# Altium PCB Pulp FMC Sensor Board_8X64Mbits_HyperRam.PcbDoc (part 2 of 3)
Units mm, origin at the board's own origin, x right, y up, seen from the top; angles counter-clockwise.
Board outline 72.9 x 68.96 mm, 4 copper layers (Top Layer, GND, PWR, Bottom Layer), stack 1.56 mm thick; 43 components, 37 nets, 422 pads, 283 vias.
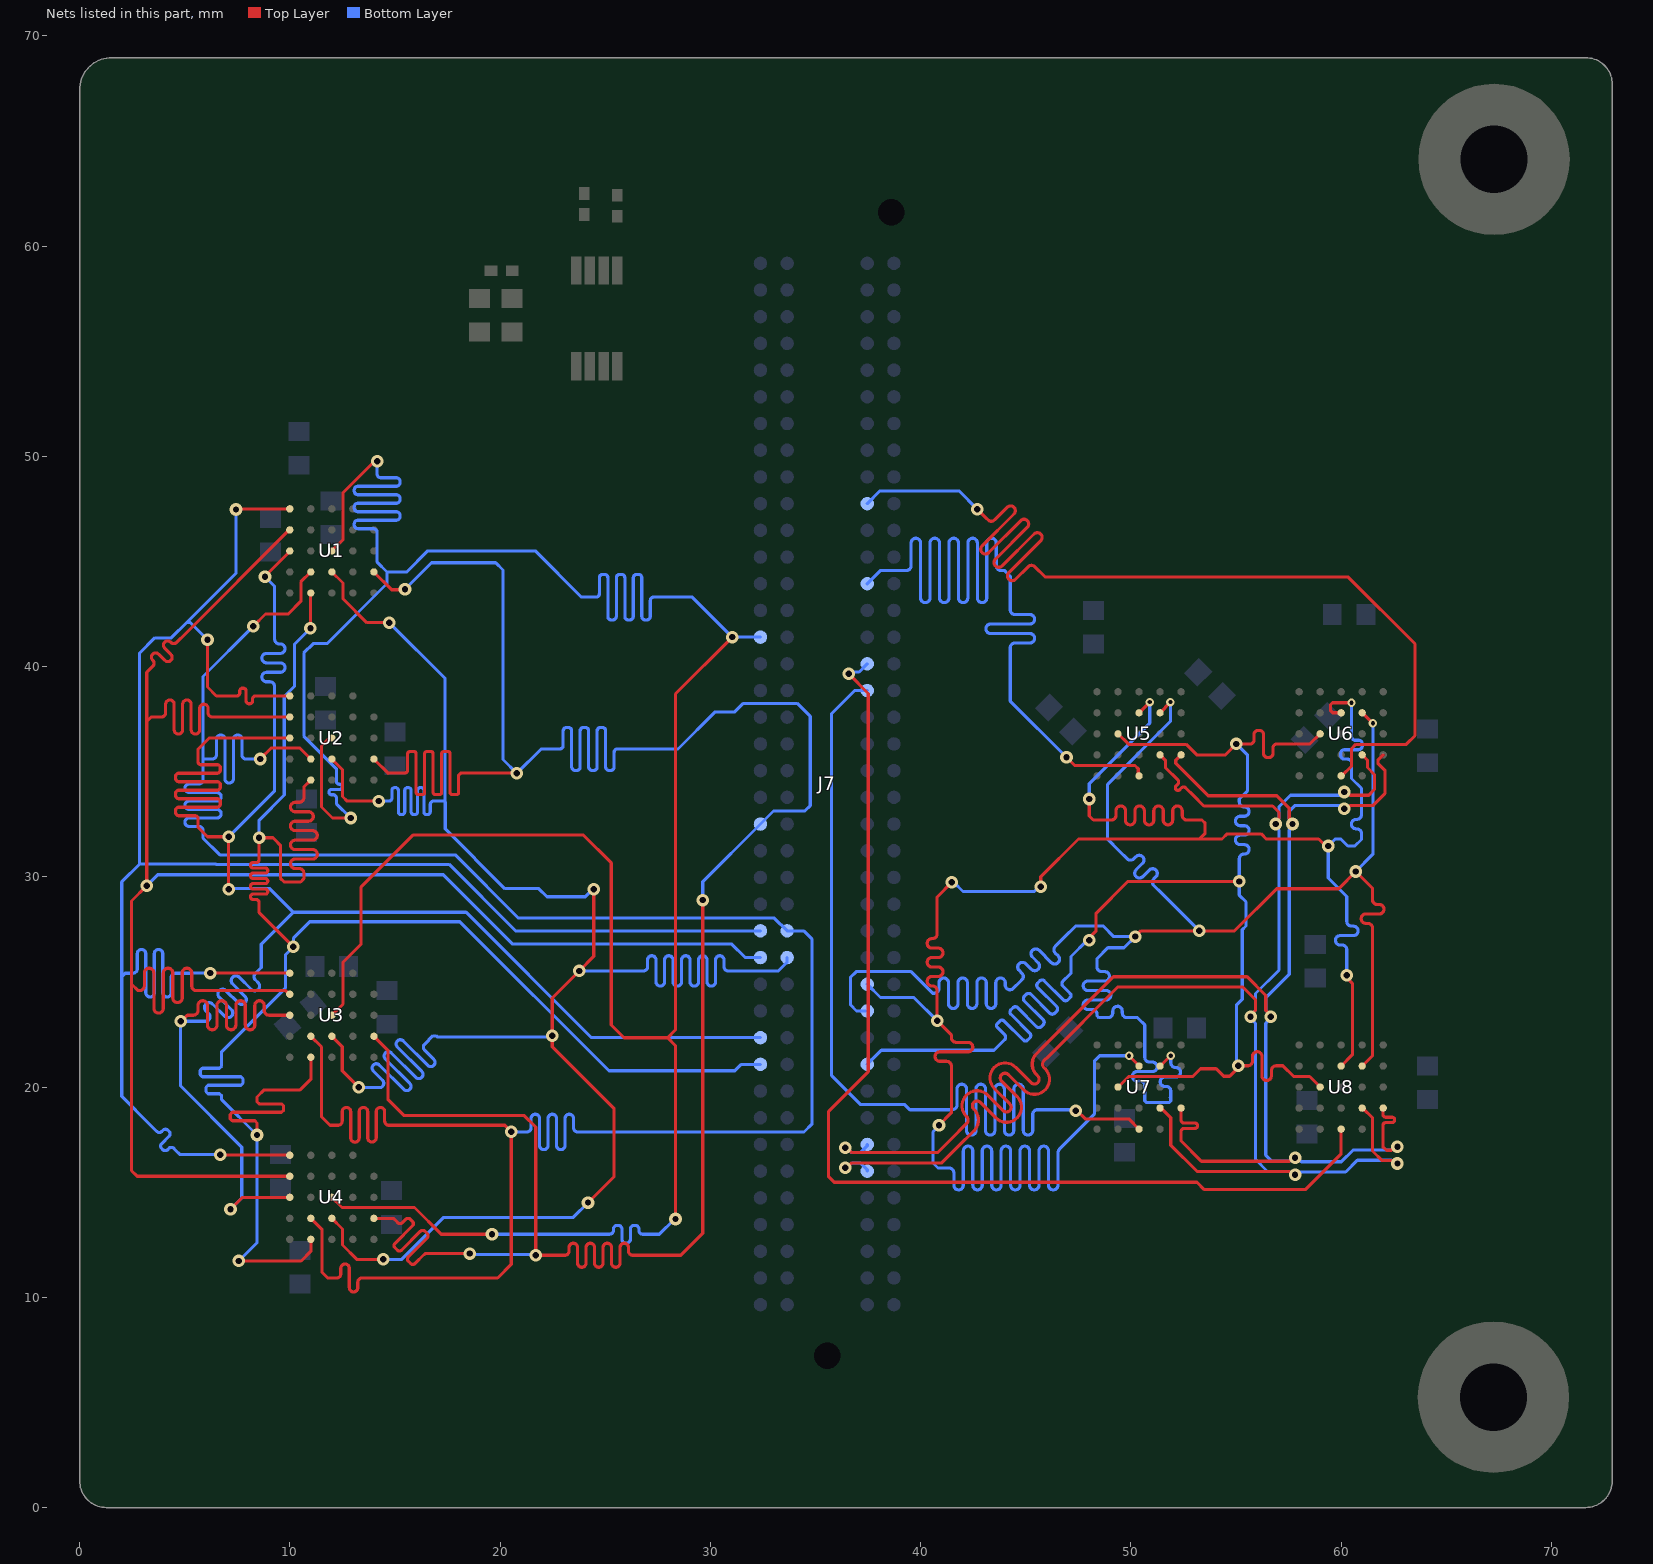
[diagram p4: the nets of this part, all layers, seen from the top]

## Via types
v1: diameter 0.6, hole 0.3, Top Layer to Bottom Layer, tented both sides, 210 vias
v2: diameter 0.4, hole 0.2, Top Layer to Bottom Layer, tented both sides, 73 vias

## Nets (pads, with @x,y where several pads share a name; then routed paths per layer and width w, separated by ;. In a path a pad name is that pad's centre, name@x,y a point inside that pad or via, vN(x,y) a via of type N, cw(c..) or ccw(c..) an arc to the next point about the centre after c; other vN are vias at no path point) (continued)
FMC_HYPER2_D2: J7.D14 U1.C4 U2.C4 U3.C4 U4.C4 | length 115.2
  Top Layer w0.15: U4.C4@11.995,13.755 12.5,13.25 12.5,12.485 13.18,11.805 v1(14.444,11.805) ; U3.C4@11.995,22.417 12.49,21.922 12.49,20.773 v1(13.276,19.987) ; U2.C4@11.995,35.602 12.5,35.097 12.5,33.821 12.719,33.602 v1(14.222,33.602) ; U1.C4@11.995,44.5 12.522,43.972 12.522,43.226 13.661,42.088 v1(14.722,42.088) ; v1(24.18,14.505) 25.419,15.744 25.419,18.969 22.475,21.913 v1(22.475,22.435) 22.475,24.235 v1(23.763,25.523) 24.454,26.214 v1(24.454,29.409)
  Bottom Layer w0.15: v1(13.276,19.987) 14.352,19.987 14.405,20.04 ccw(c14.262,20.183) 14.405,20.326 13.968,20.763 cw(c14.111,20.906) 13.968,21.049 cw(c14.111,20.906) 14.254,21.049 15.413,19.889 ccw(c15.556,20.032) 15.699,19.889 ccw(c15.556,20.032) 15.699,20.175 14.539,21.334 cw(c14.682,21.477) 14.539,21.62 cw(c14.682,21.477) 14.825,21.62 15.985,20.46 ccw(c16.128,20.603) 16.27,20.46 ccw(c16.128,20.603) 16.27,20.746 15.111,21.906 cw(c15.254,22.048) 15.111,22.191 cw(c15.254,22.048) 15.396,22.191 16.556,21.032 ccw(c16.699,21.174) 16.842,21.032 ccw(c16.699,21.174) 16.842,21.317 16.405,21.754 cw(c16.548,21.897) 16.405,22.04 16.8,22.435 16.956,22.435 17.006,22.385 18.435,22.385 18.437,22.387 22.427,22.387 v1(22.475,22.435) ; v1(14.222,33.602) 14.627,33.602 14.702,33.602 ccw(c14.702,33.752) 14.852,33.752 14.852,34.107 cw(c14.989,34.107) 14.989,34.244 15.02,34.244 cw(c15.02,34.107) 15.156,34.107 15.156,33.096 ccw(c15.293,33.096) 15.293,32.96 15.324,32.96 ccw(c15.324,33.096) 15.46,33.096 15.46,34.107 cw(c15.597,34.107) 15.597,34.244 15.628,34.244 cw(c15.628,34.107) 15.764,34.107 15.764,33.096 ccw(c15.901,33.096) 15.901,32.96 15.932,32.96 ccw(c15.932,33.096) 16.068,33.096 16.068,34.107 cw(c16.205,34.107) 16.205,34.244 16.236,34.244 cw(c16.236,34.107) 16.372,34.107 16.372,33.096 ccw(c16.509,33.096) 16.509,32.96 16.54,32.96 ccw(c16.54,33.096) 16.676,33.096 16.676,33.452 cw(c16.826,33.452) 16.826,33.602 17.115,33.602 17.343,33.602 ; v1(14.444,11.805) 15.317,11.805 17.314,13.801 23.477,13.801 v1(24.18,14.505) ; v1(14.722,42.088) 17.379,39.431 17.379,33.566 ; 17.389,33.556 17.389,32.278 20.226,29.44 21.84,29.44 22.228,29.053 24.044,29.053 24.4,29.409 v1(24.454,29.409) ; v1(23.763,25.523) 26.735,25.523 26.81,25.523 ccw(c26.81,25.725) 27.012,25.725 27.012,26.043 cw(c27.214,26.043) 27.214,26.245 cw(c27.214,26.043) 27.416,26.043 27.416,25.003 ccw(c27.618,25.003) 27.618,24.801 ccw(c27.618,25.003) 27.82,25.003 27.82,26.043 cw(c28.022,26.043) 28.022,26.245 cw(c28.022,26.043) 28.224,26.043 28.224,25.003 ccw(c28.426,25.003) 28.426,24.801 ccw(c28.426,25.003) 28.628,25.003 28.628,26.043 cw(c28.83,26.043) 28.83,26.245 cw(c28.83,26.043) 29.032,26.043 29.032,25.003 ccw(c29.234,25.003) 29.234,24.801 ccw(c29.234,25.003) 29.436,25.003 29.436,26.043 cw(c29.638,26.043) 29.638,26.245 cw(c29.638,26.043) 29.84,26.043 29.84,25.003 ccw(c30.042,25.003) 30.042,24.801 ccw(c30.042,25.003) 30.244,25.003 30.244,26.043 cw(c30.446,26.043) 30.446,26.245 cw(c30.446,26.043) 30.648,26.043 30.648,25.725 ccw(c30.85,25.725) 30.85,25.523 31.241,25.523 33.223,25.523 33.65,25.95 J7.D14@33.65,26.16
FMC_HYPER2_D3: J7.D15 U1.D4 U2.D4 U3.D4 U4.D4 | length 137.5
  Top Layer w0.15: v1(8.252,41.911) 8.84,42.5 9.922,42.5 10.521,43.099 10.521,44.026 U1.D4@10.995,44.5 ; v1(8.594,35.602) 8.594,35.612 9.11,36.128 10.468,36.128 U2.D4@10.995,35.602 ; U4.D4@10.995,13.755 11.532,13.218 11.532,11.182 11.793,10.92 12.144,10.92 12.219,10.92 ccw(c12.219,11.122) 12.421,11.122 12.421,11.38 cw(c12.623,11.38) 12.623,11.582 cw(c12.623,11.38) 12.825,11.38 12.825,10.46 ccw(c13.027,10.46) 13.027,10.258 ccw(c13.027,10.46) 13.229,10.46 13.229,10.718 cw(c13.431,10.718) 13.431,10.92 14.085,10.92 19.878,10.92 20.53,11.572 v1(20.53,17.867) 20.215,18.182 15.111,18.182 14.709,18.182 cw(c14.709,18.384) 14.507,18.384 14.507,18.832 ccw(c14.305,18.832) 14.305,19.034 ccw(c14.305,18.832) 14.103,18.832 14.103,17.589 cw(c13.901,17.589) 13.901,17.387 cw(c13.901,17.589) 13.699,17.589 13.699,18.832 ccw(c13.497,18.832) 13.497,19.034 ccw(c13.497,18.832) 13.295,18.832 13.295,17.58 cw(c13.093,17.58) 13.093,17.378 cw(c13.093,17.58) 12.891,17.58 12.891,18.832 ccw(c12.689,18.832) 12.689,19.034 ccw(c12.689,18.832) 12.487,18.832 12.487,18.384 cw(c12.285,18.384) 12.285,18.182 12.21,18.182 11.905,18.182 11.501,18.586 11.501,21.91 U3.D4@10.995,22.417
  Bottom Layer w0.15: v1(8.252,41.911) 5.867,39.527 5.867,35.602 ; v1(8.594,35.602) 8.566,35.602 7.918,35.602 cw(c7.918,35.804) 7.716,35.804 7.716,36.542 ccw(c7.514,36.542) 7.514,36.744 ccw(c7.514,36.542) 7.312,36.542 7.312,34.662 cw(c7.11,34.662) 7.11,34.46 cw(c7.11,34.662) 6.908,34.662 6.908,36.542 ccw(c6.706,36.542) 6.706,36.744 ccw(c6.706,36.542) 6.504,36.542 6.504,35.804 cw(c6.302,35.804) 6.302,35.602 6.227,35.602 5.867,35.602 ; v1(20.53,17.867) 20.532,17.865 21.193,17.865 21.268,17.865 ccw(c21.268,18.067) 21.47,18.067 21.47,18.505 cw(c21.672,18.505) 21.672,18.707 cw(c21.672,18.505) 21.874,18.505 21.874,17.225 ccw(c22.076,17.225) 22.076,17.023 ccw(c22.076,17.225) 22.278,17.225 22.278,18.505 cw(c22.48,18.505) 22.48,18.707 cw(c22.48,18.505) 22.682,18.505 22.682,17.225 ccw(c22.884,17.225) 22.884,17.023 ccw(c22.884,17.225) 23.086,17.225 23.086,18.505 cw(c23.288,18.505) 23.288,18.707 cw(c23.288,18.505) 23.49,18.505 23.49,18.067 ccw(c23.692,18.067) 23.692,17.865 24.14,17.865 34.451,17.865 34.837,18.251 34.837,27.026 34.433,27.43 J7.D15@33.65,27.43 33.042,28.038 20.874,28.038 17.87,31.042 6.667,31.042 5.867,31.842 5.867,32.118 5.867,32.193 ccw(c5.665,32.193) 5.665,32.395 5.207,32.395 cw(c5.207,32.597) 5.005,32.597 cw(c5.207,32.597) 5.207,32.799 6.527,32.799 ccw(c6.527,33.001) 6.729,33.001 ccw(c6.527,33.001) 6.527,33.203 5.207,33.203 cw(c5.207,33.405) 5.005,33.405 cw(c5.207,33.405) 5.207,33.607 6.527,33.607 ccw(c6.527,33.809) 6.729,33.809 ccw(c6.527,33.809) 6.527,34.011 5.207,34.011 cw(c5.207,34.213) 5.005,34.213 cw(c5.207,34.213) 5.207,34.415 5.665,34.415 ccw(c5.665,34.617) 5.867,34.617 5.867,34.928 5.867,35.602
FMC_HYPER2_D4: J7.C10 U1.D5 U2.D5 U3.D5 U4.D5 | length 102.4
  Top Layer w0.15: v1(7.569,11.73) 10.535,11.73 10.995,12.19 U4.D5@10.995,12.755 ; 8.122,30.55 ccw(c8.247,30.55) 8.247,30.425 8.821,30.425 cw(c8.821,30.3) 8.946,30.3 cw(c8.821,30.3) 8.821,30.175 8.247,30.175 ccw(c8.247,30.05) 8.122,30.05 ccw(c8.247,30.05) 8.247,29.925 8.821,29.925 cw(c8.821,29.8) 8.946,29.8 cw(c8.821,29.8) 8.821,29.675 8.247,29.675 ccw(c8.247,29.55) 8.122,29.55 ccw(c8.247,29.55) 8.247,29.425 8.821,29.425 cw(c8.821,29.3) 8.946,29.3 cw(c8.821,29.3) 8.821,29.175 8.247,29.175 ccw(c8.247,29.05) 8.122,29.05 ccw(c8.247,29.05) 8.247,28.925 8.384,28.925 cw(c8.384,28.775) 8.534,28.775 8.534,28.7 8.534,28.295 v1(10.16,26.669) ; 8.122,30.55 cw(c8.247,30.55) 8.247,30.675 8.384,30.675 ccw(c8.384,30.825) 8.534,30.825 8.534,31.189 v1(8.534,31.86) 9.188,31.86 9.273,31.775 9.546,31.502 9.546,29.935 9.727,29.755 10.506,29.755 10.665,29.913 10.665,30.095 10.665,30.17 ccw(c10.44,30.17) 10.44,30.395 10.251,30.395 cw(c10.251,30.62) 10.026,30.62 cw(c10.251,30.62) 10.251,30.845 11.079,30.845 ccw(c11.079,31.07) 11.304,31.07 ccw(c11.079,31.07) 11.079,31.295 10.251,31.295 cw(c10.251,31.52) 10.026,31.52 cw(c10.251,31.52) 10.251,31.745 11.079,31.745 ccw(c11.079,31.97) 11.304,31.97 ccw(c11.079,31.97) 11.079,32.195 10.251,32.195 cw(c10.251,32.42) 10.026,32.42 cw(c10.251,32.42) 10.251,32.645 10.888,32.645 ccw(c10.888,32.87) 11.113,32.87 ccw(c10.888,32.87) 10.888,33.095 10.251,33.095 cw(c10.251,33.32) 10.026,33.32 cw(c10.251,33.32) 10.251,33.545 10.44,33.545 ccw(c10.44,33.77) 10.665,33.77 10.665,34.21 10.665,34.272 U2.D5@10.995,34.602 ; v1(8.433,17.722) 8.433,18.218 8.433,18.293 8.332,18.394 7.264,18.394 7.163,18.495 7.163,18.697 7.264,18.798 9.602,18.798 9.703,18.899 9.703,19.101 9.602,19.202 8.534,19.202 8.433,19.303 8.433,19.53 ; 8.436,19.53 8.773,19.867 10.486,19.867 10.995,20.375 U3.D5@10.995,21.417 ; v1(10.976,41.823) 10.985,41.832 10.985,43.491 U1.D5@10.995,43.5
  Bottom Layer w0.15: v1(7.569,11.73) 8.433,12.593 v1(8.433,17.722) 6.75,19.405 6.75,19.508 6.75,19.583 6.649,19.684 6.111,19.684 6.01,19.785 6.01,19.987 6.111,20.088 7.665,20.088 7.766,20.189 7.766,20.391 7.665,20.492 5.835,20.492 5.734,20.593 5.734,20.795 5.835,20.896 6.649,20.896 6.75,20.997 6.75,21.249 6.75,21.684 9.798,24.732 9.798,26.307 10.174,26.683 10.174,27.097 10.94,27.863 18.085,27.863 25.175,20.773 31.164,20.773 31.471,21.08 J7.C10@32.38,21.08 ; v1(8.534,31.86) 8.534,32.691 9.733,33.89 9.733,38.579 10.215,39.061 10.215,41.062 v1(10.976,41.823)
FMC_HYPER2_D5: J7.C11 U1.E3 U2.E3 U3.E3 U4.E3 | length 112.5
  Top Layer w0.15: v1(4.811,23.128) 4.835,23.128 5.124,23.417 5.328,23.417 5.403,23.417 ccw(c5.403,23.642) 5.628,23.642 5.628,23.884 cw(c5.853,23.884) 5.853,24.109 cw(c5.853,23.884) 6.078,23.884 6.078,22.95 ccw(c6.303,22.95) 6.303,22.725 ccw(c6.303,22.95) 6.528,22.95 6.528,23.884 cw(c6.753,23.884) 6.753,24.109 cw(c6.753,23.884) 6.978,23.884 6.978,22.95 ccw(c7.203,22.95) 7.203,22.725 ccw(c7.203,22.95) 7.428,22.95 7.428,23.884 cw(c7.653,23.884) 7.653,24.109 cw(c7.653,23.884) 7.878,23.884 7.878,22.95 ccw(c8.103,22.95) 8.103,22.725 ccw(c8.103,22.95) 8.328,22.95 8.328,23.884 cw(c8.553,23.884) 8.553,24.109 cw(c8.553,23.884) 8.778,23.884 8.778,23.642 ccw(c9.003,23.642) 9.003,23.417 9.327,23.417 U3.E3@9.995,23.417 ; v1(7.087,29.409) v1(7.087,31.904) 6.082,31.904 5.628,32.358 5.628,32.683 5.628,32.758 ccw(c5.478,32.758) 5.478,32.908 4.707,32.908 cw(c4.707,33.049) 4.566,33.049 4.566,33.17 cw(c4.707,33.17) 4.707,33.312 6.549,33.312 ccw(c6.549,33.453) 6.69,33.453 6.69,33.574 ccw(c6.549,33.574) 6.549,33.716 4.707,33.716 cw(c4.707,33.857) 4.566,33.857 4.566,33.978 cw(c4.707,33.978) 4.707,34.12 6.549,34.12 ccw(c6.549,34.261) 6.69,34.261 6.69,34.382 ccw(c6.549,34.382) 6.549,34.524 4.707,34.524 cw(c4.707,34.665) 4.566,34.665 4.566,34.786 cw(c4.707,34.786) 4.707,34.928 6.549,34.928 ccw(c6.549,35.069) 6.69,35.069 6.69,35.19 ccw(c6.549,35.19) 6.549,35.332 5.778,35.332 cw(c5.778,35.482) 5.628,35.482 5.628,35.927 5.628,36.075 6.154,36.602 U2.E3@9.995,36.602 ; v1(7.176,14.187) 7.745,14.755 U4.E3@9.995,14.755 ; v1(8.812,44.268) 8.812,44.293 9.995,45.475 U1.E3@9.995,45.5
  Bottom Layer w0.15: v1(7.087,29.409) 7.115,29.438 9.039,29.438 10.16,28.317 ; v1(7.087,31.904) 9.274,34.091 9.274,38.977 9.274,39.052 ccw(c9.049,39.052) 9.049,39.277 8.888,39.277 cw(c8.888,39.502) 8.663,39.502 cw(c8.888,39.502) 8.888,39.727 9.54,39.727 ccw(c9.54,39.952) 9.765,39.952 ccw(c9.54,39.952) 9.54,40.177 8.888,40.177 cw(c8.888,40.402) 8.663,40.402 cw(c8.888,40.402) 8.888,40.627 9.54,40.627 ccw(c9.54,40.852) 9.765,40.852 ccw(c9.54,40.852) 9.54,41.077 9.499,41.077 cw(c9.499,41.302) 9.274,41.302 9.274,41.823 9.274,43.807 v1(8.812,44.268) ; v1(7.176,14.187) 7.712,14.723 7.712,17.141 4.801,20.052 4.801,23.117 v1(4.811,23.128) 6.081,23.128 6.134,23.181 ccw(c5.974,23.34) 6.134,23.499 6.001,23.631 cw(c6.16,23.79) 6.001,23.95 cw(c6.16,23.79) 6.319,23.95 6.902,23.367 ccw(c7.061,23.526) 7.22,23.367 ccw(c7.061,23.526) 7.22,23.685 6.638,24.268 cw(c6.797,24.427) 6.638,24.586 cw(c6.797,24.427) 6.956,24.586 7.539,24.003 ccw(c7.698,24.162) 7.857,24.003 ccw(c7.698,24.162) 7.857,24.321 7.274,24.904 cw(c7.433,25.063) 7.274,25.222 cw(c7.433,25.063) 7.592,25.222 8.175,24.64 ccw(c8.334,24.799) 8.493,24.64 ccw(c8.334,24.799) 8.493,24.958 8.361,25.09 cw(c8.52,25.249) 8.361,25.408 8.603,25.65 8.636,25.683 8.636,26.793 10.16,28.317 ; J7.C11@32.38,22.35 24.347,22.35 18.38,28.317 10.16,28.317
FMC_HYPER2_D6: J7.C14 U1.E2 U2.E2 U3.E2 U4.E2 | length 103.9
  Top Layer w0.15: U4.E2@9.995,15.755 2.735,15.755 2.464,16.027 2.464,24.901 ; U3.E2@9.995,24.417 9.964,24.417 9.794,24.587 5.89,24.587 5.553,24.587 cw(c5.553,24.812) 5.328,24.812 5.328,25.429 ccw(c5.103,25.429) 5.103,25.654 ccw(c5.103,25.429) 4.878,25.429 4.878,24.24 cw(c4.653,24.24) 4.653,24.015 cw(c4.653,24.24) 4.428,24.24 4.428,25.429 ccw(c4.203,25.429) 4.203,25.654 ccw(c4.203,25.429) 3.978,25.429 3.978,23.744 cw(c3.753,23.744) 3.753,23.519 cw(c3.753,23.744) 3.528,23.744 3.528,25.429 ccw(c3.303,25.429) 3.303,25.654 ccw(c3.303,25.429) 3.078,25.429 3.078,24.812 cw(c2.853,24.812) 2.853,24.587 2.778,24.587 2.464,24.901 ; U2.E2@9.995,37.602 6.789,37.602 6.311,37.602 cw(c6.311,37.804) 6.109,37.804 6.109,38.012 ccw(c5.907,38.012) 5.907,38.214 ccw(c5.907,38.012) 5.705,38.012 5.705,36.992 cw(c5.503,36.992) 5.503,36.79 cw(c5.503,36.992) 5.301,36.992 5.301,38.212 ccw(c5.099,38.212) 5.099,38.414 ccw(c5.099,38.212) 4.897,38.212 4.897,36.992 cw(c4.695,36.992) 4.695,36.79 cw(c4.695,36.992) 4.493,36.992 4.493,38.212 ccw(c4.291,38.212) 4.291,38.414 ccw(c4.291,38.212) 4.089,38.212 4.089,37.804 cw(c3.887,37.804) 3.887,37.602 3.812,37.602 3.404,37.602 3.188,37.386 ; U1.E2@9.995,46.5 9.963,46.5 5.056,41.593 4.619,41.156 cw(c4.476,41.299) 4.333,41.156 4.328,41.162 ccw(c4.185,41.019) 4.042,41.162 ccw(c4.185,41.019) 4.042,40.876 4.339,40.579 cw(c4.196,40.436) 4.339,40.293 cw(c4.196,40.436) 4.053,40.293 3.756,40.59 ccw(c3.614,40.447) 3.471,40.59 ccw(c3.614,40.447) 3.471,40.305 3.476,40.299 cw(c3.334,40.156) 3.476,40.013 3.423,39.96 3.188,39.725 3.188,37.386 ; 2.464,24.901 2.464,28.85 v1(3.188,29.574) 3.188,37.386
  Bottom Layer w0.15: v1(3.188,29.574) 3.708,30.095 17.292,30.095 20.591,26.796 31.02,26.796 31.656,26.16 J7.C14@32.38,26.16
FMC_HYPER2_D7: J7.C15 U1.E1 U2.E1 U3.E1 U4.E1 | length 99.5
  Top Layer w0.15: v1(6.078,41.278) 6.078,39.027 6.504,38.602 7.11,38.602 7.465,38.602 ccw(c7.465,38.752) 7.615,38.752 7.615,38.837 cw(c7.751,38.837) 7.751,38.974 7.782,38.974 cw(c7.782,38.837) 7.919,38.837 7.919,38.366 ccw(c8.055,38.366) 8.055,38.23 8.086,38.23 ccw(c8.086,38.366) 8.223,38.366 8.223,38.452 cw(c8.373,38.452) 8.373,38.602 8.448,38.602 U2.E1@9.995,38.602 ; v1(6.207,25.421) 6.209,25.419 9.992,25.419 U3.E1@9.995,25.417 ; v1(6.68,16.785) 6.695,16.77 9.98,16.77 U4.E1@9.995,16.755 ; v1(7.434,47.473) 7.447,47.487 9.981,47.487 U1.E1@9.995,47.5
  Bottom Layer w0.15: 5.207,25.421 v1(6.207,25.421) ; 5.24,25.417 5.207,25.417 4.559,25.417 ccw(c4.559,25.215) 4.357,25.215 4.357,24.487 cw(c4.155,24.487) 4.155,24.285 cw(c4.155,24.487) 3.953,24.487 3.953,26.347 ccw(c3.751,26.347) 3.751,26.549 ccw(c3.751,26.347) 3.549,26.347 3.549,24.487 cw(c3.347,24.487) 3.347,24.285 cw(c3.347,24.487) 3.145,24.487 3.145,26.347 ccw(c2.943,26.347) 2.943,26.549 ccw(c2.943,26.347) 2.741,26.347 2.741,25.619 cw(c2.539,25.619) 2.539,25.417 2.464,25.417 2.167,25.417 2,25.25 ; v1@6.074,41.278 v1(6.078,41.278) 5.249,42.106 5.103,42.106 ; v1(6.68,16.785) 4.775,16.785 4.528,17.033 4.475,17.086 ccw(c4.36,16.972) 4.246,17.086 4.183,17.023 cw(c4.069,17.138) 3.955,17.023 3.898,17.08 cw(c4.012,17.195) 3.898,17.309 4.252,17.663 ccw(c4.137,17.777) 4.252,17.892 4.195,17.949 ccw(c4.08,17.834) 3.966,17.949 3.903,17.886 cw(c3.789,18) 3.675,17.886 3.37,18.19 2,19.561 2,25.25 ; v1(7.434,47.473) 7.434,44.437 5.103,42.106 ; J7.C15@32.38,27.43 20.732,27.43 17.57,30.592 6.481,30.592 6.47,30.603 2.845,30.603 ; 2,25.25 2,29.758 2.845,30.603 ; 2.845,30.603 2.845,40.631 3.58,41.366 4.362,41.366 5.103,42.106
FMC_HYPER2_RESET: J7.C19 U1.A4 U2.A4 U3.A4 U4.A4 | length 136
  Top Layer w0.15: U4.A4@13.995,13.755 14.921,13.755 15.073,13.604 15.126,13.551 ccw(c15.237,13.662) 15.349,13.551 15.507,13.709 cw(c15.619,13.598) 15.73,13.709 15.825,13.614 cw(c15.714,13.502) 15.825,13.391 15.002,12.567 ccw(c15.113,12.456) 15.002,12.345 15.097,12.249 ccw(c15.209,12.36) 15.32,12.249 16.204,13.133 cw(c16.315,13.022) 16.427,13.133 16.522,13.038 cw(c16.411,12.927) 16.522,12.815 15.638,11.931 ccw(c15.749,11.82) 15.638,11.708 15.734,11.613 ccw(c15.845,11.724) 15.956,11.613 16.377,12.034 cw(c16.488,11.922) 16.488,12.08 17.359,12.08 v1(18.561,12.08) ; U3.A4@13.995,22.417 14.66,21.752 14.66,19.415 15.435,18.64 21.152,18.64 21.692,18.1 v1(21.692,12) 23.001,12 23.076,12 ccw(c23.076,12.202) 23.278,12.202 23.278,12.37 cw(c23.48,12.37) 23.48,12.572 cw(c23.48,12.37) 23.682,12.37 23.682,11.63 ccw(c23.884,11.63) 23.884,11.428 ccw(c23.884,11.63) 24.086,11.63 24.086,12.37 cw(c24.288,12.37) 24.288,12.572 cw(c24.288,12.37) 24.49,12.37 24.49,11.63 ccw(c24.692,11.63) 24.692,11.428 ccw(c24.692,11.63) 24.894,11.63 24.894,12.37 cw(c25.096,12.37) 25.096,12.572 cw(c25.096,12.37) 25.298,12.37 25.298,11.63 ccw(c25.5,11.63) 25.5,11.428 ccw(c25.5,11.63) 25.702,11.63 25.702,12.37 cw(c25.904,12.37) 25.904,12.572 cw(c25.904,12.37) 26.106,12.37 26.106,12.202 ccw(c26.308,12.202) 26.308,12 26.823,12 28.592,12 29.638,13.045 v1(29.638,28.893) ; U2.A4@13.995,35.602 14.669,34.928 14.674,34.934 15.375,34.934 15.45,34.934 ccw(c15.45,35.084) 15.6,35.084 15.6,35.855 cw(c15.701,35.855) 15.701,35.956 15.903,35.956 cw(c15.903,35.855) 16.004,35.855 16.004,34.013 ccw(c16.105,34.013) 16.105,33.912 16.307,33.912 ccw(c16.307,34.013) 16.408,34.013 16.408,35.855 cw(c16.509,35.855) 16.509,35.956 16.711,35.956 cw(c16.711,35.855) 16.812,35.855 16.812,34.013 ccw(c16.913,34.013) 16.913,33.912 17.115,33.912 ccw(c17.115,34.013) 17.216,34.013 17.216,35.855 cw(c17.317,35.855) 17.317,35.956 17.519,35.956 cw(c17.519,35.855) 17.62,35.855 17.62,34.013 ccw(c17.721,34.013) 17.721,33.912 17.923,33.912 ccw(c17.923,34.013) 18.024,34.013 18.024,34.784 cw(c18.174,34.784) 18.174,34.934 18.561,34.934 20.781,34.934 v1(20.792,34.923) ; U1.A4@13.995,44.5 14.84,43.655 15.447,43.655 v1(15.475,43.683)
  Bottom Layer w0.15: v1(15.475,43.683) 16.732,44.94 19.785,44.94 20.134,44.592 20.134,35.581 v1(20.792,34.923) 21.951,36.082 22.76,36.082 22.835,36.082 ccw(c22.835,36.243) 22.997,36.243 22.997,36.942 cw(c23.158,36.942) 23.158,37.104 23.239,37.104 cw(c23.239,36.942) 23.401,36.942 23.401,35.221 ccw(c23.562,35.221) 23.562,35.06 23.643,35.06 ccw(c23.643,35.221) 23.805,35.221 23.805,36.942 cw(c23.966,36.942) 23.966,37.104 24.047,37.104 cw(c24.047,36.942) 24.209,36.942 24.209,35.221 ccw(c24.37,35.221) 24.37,35.06 24.451,35.06 ccw(c24.451,35.221) 24.613,35.221 24.613,36.942 cw(c24.774,36.942) 24.774,37.104 24.855,37.104 cw(c24.855,36.942) 25.017,36.942 25.017,35.221 ccw(c25.178,35.221) 25.178,35.06 25.259,35.06 ccw(c25.259,35.221) 25.421,35.221 25.421,35.92 cw(c25.582,35.92) 25.582,36.082 26.172,36.082 28.46,36.082 30.222,37.844 31.164,37.844 31.571,38.25 34.126,38.25 34.745,37.631 34.745,33.388 34.487,33.13 33,33.13 J7.C19@32.38,32.51 29.638,29.768 v1(29.638,28.893) ; v1(18.561,12.08) 18.601,12.04 21.652,12.04 v1(21.692,12)
FMC_HYPER2_RWDS: J7.C26 U1.C3 U2.C3 U3.C3 U4.C3 | length 154.5
  Top Layer w0.15: U4.C3@11.995,14.755 12.479,14.271 15.926,14.271 17.196,13.001 v1(19.614,13.001) ; U3.C3@11.995,23.417 12.524,23.946 12.524,25.941 13.387,26.804 13.387,29.523 15.848,31.984 23.964,31.984 25.283,30.665 25.283,22.953 25.89,22.346 27.965,22.346 ; U2.C3@11.995,36.602 11.956,36.563 11.84,36.563 11.501,36.224 11.501,33.322 12.024,32.799 v1(12.891,32.799) ; U1.C3@11.995,45.5 12.522,46.028 12.522,48.265 14.026,49.768 v1(14.148,49.768) ; v1(28.341,13.725) 28.341,21.971 27.965,22.346 ; v1(31.041,41.402) 28.341,38.702 28.341,22.722 27.965,22.346
  Bottom Layer w0.15: v1(12.891,32.799) 12.21,33.48 12.21,33.677 12.21,33.752 ccw(c12.06,33.752) 12.06,33.902 11.985,33.902 cw(c11.985,34.027) 11.86,34.027 cw(c11.985,34.027) 11.985,34.152 12.36,34.152 ccw(c12.36,34.277) 12.485,34.277 ccw(c12.36,34.277) 12.36,34.402 cw(c12.36,34.552) 12.21,34.552 12.21,34.923 12.21,35.147 10.665,36.691 10.665,40.653 11.107,41.094 11.761,41.094 14.617,43.95 14.617,44.5 ; v1(14.148,49.768) 14.148,49.485 14.148,49.163 ccw(c14.329,49.163) 14.329,48.981 15.058,48.981 cw(c15.058,48.799) 15.24,48.799 15.24,48.759 cw(c15.058,48.759) 15.058,48.577 13.237,48.577 ccw(c13.237,48.395) 13.056,48.395 13.056,48.355 ccw(c13.237,48.355) 13.237,48.173 15.058,48.173 cw(c15.058,47.991) 15.24,47.991 15.24,47.951 cw(c15.058,47.951) 15.058,47.769 13.237,47.769 ccw(c13.237,47.587) 13.056,47.587 13.056,47.547 ccw(c13.237,47.547) 13.237,47.365 15.058,47.365 cw(c15.058,47.183) 15.24,47.183 15.24,47.143 cw(c15.058,47.143) 15.058,46.961 13.237,46.961 ccw(c13.237,46.779) 13.056,46.779 13.056,46.739 ccw(c13.237,46.739) 13.237,46.557 13.966,46.557 cw(c13.966,46.375) 14.148,46.375 14.148,46.3 14.148,44.97 14.617,44.5 ; v1(19.614,13.001) 25.129,13.001 25.204,13.001 ccw(c25.204,13.183) 25.386,13.183 25.386,13.241 cw(c25.568,13.241) 25.568,13.423 25.608,13.423 cw(c25.608,13.241) 25.79,13.241 25.79,12.761 ccw(c25.972,12.761) 25.972,12.579 26.012,12.579 ccw(c26.012,12.761) 26.194,12.761 26.194,13.241 cw(c26.376,13.241) 26.376,13.423 26.416,13.423 cw(c26.416,13.241) 26.598,13.241 26.598,13.183 ccw(c26.78,13.183) 26.78,13.001 27.378,13.001 27.574,13.001 28.298,13.725 v1(28.341,13.725) ; v1(31.041,41.402) 29.14,43.303 27.378,43.303 27.303,43.303 ccw(c27.303,43.141) 27.142,43.141 27.142,42.383 cw(c26.98,42.383) 26.98,42.221 26.899,42.221 cw(c26.899,42.383) 26.738,42.383 26.738,44.223 ccw(c26.576,44.223) 26.576,44.385 26.495,44.385 ccw(c26.495,44.223) 26.334,44.223 26.334,42.383 cw(c26.172,42.383) 26.172,42.221 26.091,42.221 cw(c26.091,42.383) 25.93,42.383 25.93,44.223 ccw(c25.768,44.223) 25.768,44.385 25.687,44.385 ccw(c25.687,44.223) 25.526,44.223 25.526,42.383 cw(c25.364,42.383) 25.364,42.221 25.283,42.221 cw(c25.283,42.383) 25.122,42.383 25.122,44.223 ccw(c24.96,44.223) 24.96,44.385 24.879,44.385 ccw(c24.879,44.223) 24.718,44.223 24.718,43.465 cw(c24.556,43.465) 24.556,43.303 24.213,43.303 23.866,43.303 21.669,45.5 16.558,45.5 15.558,44.5 14.617,44.5 ; v1(31.041,41.402) J7.C26@32.379,41.401
FMC_HYPER_CK_N: J7.G7 U5.B1 U7.B1 U8.B1 | length 83
  Top Layer w0.15: v1(36.416,17.118) 36.494,17.118 36.729,16.883 40.804,16.883 41.398,17.477 42.192,18.272 ccw(c42.033,18.431) 42.192,18.591 ; 42.191,18.591 42.178,18.604 cw(c42.683,19.11) 42.177,19.614 42.179,19.616 cw(c42.683,19.11) 43.188,19.615 43.923,18.88 ccw(c44.082,19.04) 44.241,18.88 ccw(c44.082,19.04) 44.241,19.199 43.507,19.933 cw(c44.012,20.438) 43.505,20.942 43.508,20.945 cw(c44.012,20.438) 44.517,20.943 45.251,20.209 ccw(c45.41,20.368) 45.57,20.209 ccw(c45.41,20.368) 45.57,20.527 45.514,20.583 cw(c46.019,21.088) 45.514,21.593 45.74,21.82 49.168,25.247 55.525,25.247 56.416,24.356 56.416,23.657 56.651,23.422 v1(56.651,23.344) ; U7.B1@52.387,19 52.387,18.832 52.387,18.436 ccw(c52.537,18.436) 52.537,18.286 53.044,18.286 cw(c53.044,18.161) 53.169,18.161 cw(c53.044,18.161) 53.044,18.036 52.537,18.036 ccw(c52.537,17.886) 52.387,17.886 52.387,17.561 52.387,17.437 53.35,16.474 57.529,16.474 57.686,16.631 v1(57.808,16.631) ; U5.B1@52.387,35.8 52.132,35.545 52.132,35.4 53.675,33.856 56.942,33.856 57.531,33.267 57.531,32.787 57.686,32.632 v1(57.686,32.51) ; v1(60.147,33.232) 60.268,33.232 60.424,33.388 61.512,33.388 62.079,33.954 62.079,35.066 61.745,35.4 61.745,35.545 62,35.8 ; U8.B1@62,19 61.983,18.983 61.983,18.715 ccw(c62.133,18.715) 62.133,18.565 62.42,18.565 cw(c62.42,18.44) 62.545,18.44 cw(c62.42,18.44) 62.42,18.315 62.133,18.315 ccw(c62.133,18.165) 61.983,18.165 61.983,17.84 61.983,17.164 62.155,16.991 62.381,16.991 62.554,17.164 v1(62.676,17.164)
  Bottom Layer w0.15: v1(36.416,17.118) 36.49,17.118 36.729,16.88 37.135,16.88 37.46,17.205 J7.G7@37.46,17.27 ; v1@59.95,33.388 57.792,33.388 57.531,33.127 57.531,32.787 57.686,32.632 v1(57.686,32.51) 57.686,32.388 57.531,32.233 57.531,25.362 56.416,24.246 56.416,23.657 56.651,23.422 v1(56.651,23.344) 56.651,23.266 56.416,23.031 56.416,16.76 56.7,16.476 57.081,16.476 57.531,16.476 57.686,16.631 v1(57.808,16.631) 57.93,16.631 58.11,16.451 60.009,16.451 60.567,17.009 62.399,17.009 62.554,17.164 v1(62.676,17.164)
FMC_HYPER_CK_P: J7.G6 U5.B2 U6.B2 U7.B2 U8.B2 | length 83.1
  Top Layer w0.15: v1(36.416,16.158) 36.494,16.158 36.729,16.394 41.006,16.394 41.744,17.131 42.538,17.926 ccw(c42.033,18.431) 42.61,18.852 ; 42.539,18.936 42.61,18.864 ; 42.538,18.936 42.524,18.95 cw(c42.683,19.11) 42.524,19.269 cw(c42.683,19.11) 42.842,19.269 43.577,18.534 ccw(c44.082,19.04) 44.586,18.533 44.588,18.536 ccw(c44.082,19.04) 44.587,19.545 43.853,20.279 cw(c44.012,20.438) 43.853,20.597 cw(c44.012,20.438) 44.171,20.597 44.905,19.863 ccw(c45.41,20.368) 45.914,19.862 45.917,19.864 ccw(c45.41,20.368) 45.916,20.873 45.86,20.929 cw(c46.019,21.088) 45.86,21.247 46.086,21.473 49.37,24.758 55.322,24.758 55.926,24.153 55.926,23.657 55.691,23.422 v1(55.691,23.344) ; U7.B2@51.387,19 51.437,19 51.897,18.54 51.897,17.234 53.148,15.984 57.533,15.984 57.686,15.831 v1(57.808,15.831) ; U5.B2@51.387,35.8 51.642,35.545 51.642,35.197 52.226,34.614 cw(c52.119,34.508) 52.226,34.401 52.15,34.326 ccw(c52.238,34.237) 52.15,34.149 ccw(c52.238,34.237) 52.327,34.149 52.402,34.225 cw(c52.508,34.119) 52.614,34.225 52.964,33.875 53.473,33.367 56.74,33.367 57.042,33.064 57.042,32.787 56.886,32.632 v1(56.886,32.51) ; v1(60.147,34.032) 60.268,34.032 60.423,33.878 61.31,33.878 61.589,34.157 61.589,34.863 61.255,35.197 61.255,35.545 U6.B2@61,35.8 ; U8.B2@61,19 61.033,19 61.493,18.54 61.493,16.961 61.952,16.502 v1@62.416,16.502
  Bottom Layer w0.15: v1(36.416,16.158) 36.497,16.158 36.729,16.39 37.135,16.39 37.46,16.065 J7.G6@37.46,16 ; v1@59.95,33.877 57.59,33.877 57.042,33.329 57.042,32.787 56.886,32.632 v1(56.886,32.51) 56.886,32.388 57.042,32.233 57.042,25.565 55.926,24.449 55.926,23.657 55.691,23.422 v1(55.691,23.344) 55.691,23.266 55.926,23.031 55.926,16.558 56.498,15.986 57.283,15.986 57.531,15.986 57.686,15.831 v1(57.808,15.831) 57.93,15.831 58.06,15.961 60.212,15.961 60.77,16.519 62.399,16.519 62.554,16.364 v1(62.676,16.364)
FMC_HYPER_CSN0: J7.G24 U7.A3 | length 52.7
  Top Layer w0.15: v1(47.372,18.878) 47.435,18.878 47.828,18.485 49.902,18.485 U7.A3@50.387,18
  Bottom Layer w0.15: J7.G24@37.46,38.86 36.858,38.86 35.765,37.767 35.765,20.544 37.143,19.165 39.246,19.165 39.487,18.924 41.132,18.924 41.506,18.924 ccw(c41.506,19.149) 41.731,19.149 41.731,19.91 cw(c41.956,19.91) 41.956,20.135 cw(c41.956,19.91) 42.181,19.91 42.181,17.938 ccw(c42.406,17.938) 42.406,17.713 ccw(c42.406,17.938) 42.631,17.938 42.631,19.91 cw(c42.856,19.91) 42.856,20.135 cw(c42.856,19.91) 43.081,19.91 43.081,17.938 ccw(c43.306,17.938) 43.306,17.713 ccw(c43.306,17.938) 43.531,17.938 43.531,19.91 cw(c43.756,19.91) 43.756,20.135 cw(c43.756,19.91) 43.981,19.91 43.981,17.938 ccw(c44.206,17.938) 44.206,17.713 ccw(c44.206,17.938) 44.431,17.938 44.431,19.91 cw(c44.656,19.91) 44.656,20.135 cw(c44.656,19.91) 44.881,19.91 44.881,17.938 ccw(c45.106,17.938) 45.106,17.713 ccw(c45.106,17.938) 45.331,17.938 45.331,18.699 cw(c45.556,18.699) 45.556,18.924 45.631,18.924 47.326,18.924 v1(47.372,18.878)
FMC_HYPER_CSN1: J7.G25 U8.A3 | length 52.7
  Top Layer w0.15: v1@36.575,39.654 37.509,38.72 37.509,20.733 35.621,18.845 35.621,15.735 35.881,15.475 53.142,15.475 53.494,15.123 58.299,15.123 60,16.824 U8.A3@60,18
  Bottom Layer w0.15: v1(36.575,39.658) 36.661,39.744 37.074,39.744 J7.G25@37.46,40.13
FMC_HYPER_CSN2: J7.G28 U5.A3 | length 52.7
  Top Layer w0.15: v1(46.939,35.68) 47.327,35.292 50.194,35.292 50.349,35.138 50.349,34.838 U5.A3@50.387,34.8
  Bottom Layer w0.15: J7.G28@37.46,43.94 38.093,44.573 39.246,44.573 39.321,44.573 ccw(c39.321,44.798) 39.546,44.798 39.546,45.879 cw(c39.771,45.879) 39.771,46.104 cw(c39.771,45.879) 39.996,45.879 39.996,43.267 ccw(c40.221,43.267) 40.221,43.042 ccw(c40.221,43.267) 40.446,43.267 40.446,45.879 cw(c40.671,45.879) 40.671,46.104 cw(c40.671,45.879) 40.896,45.879 40.896,43.267 ccw(c41.121,43.267) 41.121,43.042 ccw(c41.121,43.267) 41.346,43.267 41.346,45.879 cw(c41.571,45.879) 41.571,46.104 cw(c41.571,45.879) 41.796,45.879 41.796,43.267 ccw(c42.021,43.267) 42.021,43.042 ccw(c42.021,43.267) 42.246,43.267 42.246,45.879 cw(c42.471,45.879) 42.471,46.104 cw(c42.471,45.879) 42.696,45.879 42.696,43.267 ccw(c42.921,43.267) 42.921,43.042 ccw(c42.921,43.267) 43.146,43.267 43.146,45.879 cw(c43.371,45.879) 43.371,46.104 cw(c43.371,45.879) 43.596,45.879 43.596,44.798 ccw(c43.821,44.798) 43.821,44.573 43.977,44.573 44.148,44.402 44.261,44.29 44.261,42.772 44.261,42.697 ccw(c44.486,42.697) 44.486,42.472 45.193,42.472 cw(c45.193,42.247) 45.418,42.247 cw(c45.193,42.247) 45.193,42.022 43.328,42.022 ccw(c43.328,41.797) 43.103,41.797 ccw(c43.328,41.797) 43.328,41.572 45.193,41.572 cw(c45.193,41.347) 45.418,41.347 cw(c45.193,41.347) 45.193,41.122 44.486,41.122 ccw(c44.486,40.897) 44.261,40.897 44.261,40.482 44.261,38.358 v1(46.939,35.68)
FMC_HYPER_CSN3: J7.G31 U6.A3 | length 52.7
  Top Layer w0.15: v1(42.687,47.489) 42.69,47.489 43.149,47.03 43.202,46.977 ccw(c43.361,47.136) 43.52,46.977 44.12,47.577 cw(c44.279,47.418) 44.438,47.577 cw(c44.279,47.418) 44.438,47.259 42.921,45.741 ccw(c43.08,45.582) 42.921,45.423 ccw(c43.08,45.582) 43.239,45.423 44.756,46.94 cw(c44.915,46.781) 45.074,46.94 cw(c44.915,46.781) 45.074,46.622 43.557,45.105 ccw(c43.716,44.946) 43.557,44.787 ccw(c43.716,44.946) 43.875,44.787 45.392,46.304 cw(c45.552,46.145) 45.711,46.304 cw(c45.552,46.145) 45.711,45.986 44.194,44.469 ccw(c44.353,44.31) 44.194,44.151 ccw(c44.353,44.31) 44.512,44.151 45.111,44.75 cw(c45.27,44.591) 45.429,44.75 45.914,44.265 60.321,44.265 63.51,41.076 63.51,36.715 63.095,36.3 60.698,36.3 60.5,36.102 60.5,35.273 60.027,34.8 U6.A3@60,34.8
  Bottom Layer w0.15: J7.G31@37.46,47.75 38.065,48.355 41.822,48.355 v1(42.687,47.489)
FMC_HYPER_D0: J7.G13 U5.D3 U6.D3 U7.D3 U8.D3 | length 123.4
  Top Layer w0.15: v1(40.873,18.182) 41.462,18.77 41.462,20.626 41.462,21.002 ccw(c41.237,21.002) 41.237,21.227 40.911,21.227 cw(c40.911,21.452) 40.686,21.452 cw(c40.911,21.452) 40.911,21.677 42.258,21.677 ccw(c42.258,21.902) 42.483,21.902 ccw(c42.258,21.902) 42.258,22.127 41.687,22.127 cw(c41.687,22.352) 41.462,22.352 41.462,22.427 41.462,22.482 41.458,22.482 v1(40.785,23.156) 40.785,24.509 40.785,24.584 ccw(c40.56,24.584) 40.56,24.809 40.532,24.809 cw(c40.532,25.034) 40.307,25.034 cw(c40.532,25.034) 40.532,25.259 40.838,25.259 ccw(c40.838,25.484) 41.063,25.484 ccw(c40.838,25.484) 40.838,25.709 40.532,25.709 cw(c40.532,25.934) 40.307,25.934 cw(c40.532,25.934) 40.532,26.159 40.838,26.159 ccw(c40.838,26.384) 41.063,26.384 ccw(c40.838,26.384) 40.838,26.609 40.532,26.609 cw(c40.532,26.834) 40.307,26.834 cw(c40.532,26.834) 40.532,27.059 40.56,27.059 ccw(c40.56,27.284) 40.785,27.284 40.785,27.71 40.785,29.042 v1(41.48,29.737) ; v1(45.715,29.53) 45.715,30.008 47.505,31.798 53.257,31.798 ; v1(48.021,33.703) 48.021,32.892 48.214,32.7 48.582,32.7 49.064,32.7 ccw(c49.064,32.925) 49.289,32.925 49.289,33.146 cw(c49.514,33.146) 49.514,33.371 cw(c49.514,33.146) 49.739,33.146 49.739,32.695 ccw(c49.964,32.695) 49.964,32.47 ccw(c49.964,32.695) 50.189,32.695 50.189,33.146 cw(c50.414,33.146) 50.414,33.371 cw(c50.414,33.146) 50.639,33.146 50.639,32.695 ccw(c50.864,32.695) 50.864,32.47 ccw(c50.864,32.695) 51.089,32.695 51.089,33.146 cw(c51.314,33.146) 51.314,33.371 cw(c51.314,33.146) 51.539,33.146 51.539,32.695 ccw(c51.764,32.695) 51.764,32.47 ccw(c51.764,32.695) 51.989,32.695 51.989,33.146 cw(c52.214,33.146) 52.214,33.371 cw(c52.214,33.146) 52.439,33.146 52.439,32.925 ccw(c52.664,32.925) 52.664,32.7 53.189,32.7 53.384,32.7 53.53,32.554 53.53,32.07 53.257,31.798 ; v2@49.914,21.48 50.387,21.007 U7.D3@50.387,21 ; U5.D3@50.388,37.8 v2(50.897,38.308) ; v1(59.385,31.463) 59.263,31.463 58.928,31.798 56.437,31.798 56.193,32.042 54.578,32.042 54.334,31.798 53.257,31.798 ; U8.D3@60,21 60.535,21.535 60.535,24.929 60.268,25.196 v1(60.268,25.318) ; U6.D3@60,37.8 59.998,37.802 59.6,37.802 59.487,37.915 59.487,38.174 59.589,38.277 v2(60.493,38.277)
  Bottom Layer w0.15: J7.G13@37.46,24.89 38.088,24.262 39.68,24.262 v1(40.785,23.156) ; v1(40.873,18.182) 40.873,18.155 40.587,17.869 40.587,16.389 40.827,16.15 41.354,16.15 cw(c41.354,15.925) 41.579,15.925 41.579,15.334 ccw(c41.804,15.334) 41.804,15.109 ccw(c41.804,15.334) 42.029,15.334 42.029,16.966 cw(c42.254,16.966) 42.254,17.191 cw(c42.254,16.966) 42.479,16.966 42.479,15.334 ccw(c42.704,15.334) 42.704,15.109 ccw(c42.704,15.334) 42.929,15.334 42.929,16.966 cw(c43.154,16.966) 43.154,17.191 cw(c43.154,16.966) 43.379,16.966 43.379,15.334 ccw(c43.604,15.334) 43.604,15.109 ccw(c43.604,15.334) 43.829,15.334 43.829,16.966 cw(c44.054,16.966) 44.054,17.191 cw(c44.054,16.966) 44.279,16.966 44.279,15.334 ccw(c44.504,15.334) 44.504,15.109 ccw(c44.504,15.334) 44.729,15.334 44.729,16.966 cw(c44.954,16.966) 44.954,17.191 cw(c44.954,16.966) 45.179,16.966 45.179,15.334 ccw(c45.404,15.334) 45.404,15.109 ccw(c45.404,15.334) 45.629,15.334 45.629,16.966 cw(c45.854,16.966) 45.854,17.191 cw(c45.854,16.966) 46.079,16.966 46.079,15.334 ccw(c46.304,15.334) 46.304,15.109 ccw(c46.304,15.334) 46.529,15.334 46.529,16.823 cw(c46.913,16.823) 46.641,17.095 46.716,17.17 48.261,18.714 48.261,21.229 48.519,21.487 v2(49.914,21.487) ; v1(41.48,29.737) 41.58,29.737 42.016,29.301 45.402,29.301 45.631,29.53 v1(45.715,29.53) ; v1(48.021,33.703) 48.021,34.435 50.897,37.31 v2(50.897,38.308) ; v1(60.268,25.318) 60.268,26.454 60.268,26.529 ccw(c60.043,26.529) 60.043,26.754 59.954,26.754 cw(c59.954,26.979) 59.729,26.979 cw(c59.954,26.979) 59.954,27.204 60.583,27.204 ccw(c60.583,27.429) 60.808,27.429 ccw(c60.583,27.429) 60.583,27.654 60.493,27.654 cw(c60.493,27.879) 60.268,27.879 60.268,28.46 60.268,29.061 59.385,29.944 v1(59.385,31.463) 59.72,31.798 59.986,31.798 60.321,31.463 60.654,31.463 60.968,31.776 60.968,31.981 60.968,32.056 ccw(c60.743,32.056) 60.743,32.281 60.712,32.281 cw(c60.712,32.506) 60.487,32.506 cw(c60.712,32.506) 60.712,32.731 60.743,32.731 ccw(c60.743,32.956) 60.968,32.956 60.968,33.388 60.968,34.203 60.493,34.678 60.493,35.341 60.493,35.416 ccw(c60.313,35.416) 60.313,35.596 60.159,35.596 cw(c60.159,35.776) 59.979,35.776 59.979,35.866 cw(c60.159,35.866) 60.159,36.046 60.827,36.046 ccw(c60.827,36.226) 61.007,36.226 61.007,36.316 ccw(c60.827,36.316) 60.827,36.496 60.673,36.496 cw(c60.673,36.676) 60.493,36.676 60.493,37.077 v2(60.493,38.277)
FMC_HYPER_D1: J7.G12 U5.D2 U6.D2 U7.D2 U8.D2 | length 100.7
  Top Layer w0.15: v1(50.2,27.158) 50.472,27.43 v1(53.245,27.43) 54.929,27.43 56.933,29.434 59.882,29.434 v1(60.698,30.251) 61.493,29.456 61.493,28.985 61.493,28.91 ccw(c61.718,28.91) 61.718,28.685 61.812,28.685 cw(c61.812,28.46) 62.037,28.46 cw(c61.812,28.46) 61.812,28.235 61.175,28.235 ccw(c61.175,28.01) 60.95,28.01 ccw(c61.175,28.01) 61.175,27.785 61.268,27.785 cw(c61.268,27.56) 61.493,27.56 61.493,26.99 61.493,21.487 61.006,21 U8.D2@61,21 ; U7.D2@51.387,21 51.399,21 v2@51.886,21.487 ; U5.D2@51.387,37.8 51.387,37.809 51.878,38.299 v2(51.878,38.308) ; U6.D2@61,37.8 v2@61.504,37.296
  Bottom Layer w0.15: J7.G12@37.46,23.62 36.95,23.62 36.661,23.909 36.661,25.22 36.932,25.491 39.546,25.491 40.573,24.464 40.648,24.464 ccw(c40.648,24.689) 40.873,24.689 40.873,24.961 cw(c41.098,24.961) 41.098,25.186 cw(c41.098,24.961) 41.323,24.961 41.323,23.966 ccw(c41.548,23.966) 41.548,23.741 ccw(c41.548,23.966) 41.773,23.966 41.773,24.961 cw(c41.998,24.961) 41.998,25.186 cw(c41.998,24.961) 42.223,24.961 42.223,23.966 ccw(c42.448,23.966) 42.448,23.741 ccw(c42.448,23.966) 42.673,23.966 42.673,24.961 cw(c42.898,24.961) 42.898,25.186 cw(c42.898,24.961) 43.123,24.961 43.123,23.966 ccw(c43.348,23.966) 43.348,23.741 ccw(c43.348,23.966) 43.573,23.966 43.573,24.961 cw(c43.798,24.961) 43.798,25.186 cw(c43.798,24.961) 44.023,24.961 44.023,24.851 ccw(c44.248,24.851) 44.407,24.691 44.761,25.045 44.814,25.098 ccw(c44.654,25.257) 44.814,25.416 44.681,25.548 cw(c44.84,25.707) 44.681,25.866 cw(c44.84,25.707) 44.999,25.866 45.265,25.601 ccw(c45.424,25.76) 45.583,25.601 ccw(c45.424,25.76) 45.583,25.919 45.317,26.185 cw(c45.477,26.344) 45.317,26.503 cw(c45.477,26.344) 45.636,26.503 46.219,25.92 ccw(c46.378,26.079) 46.537,25.92 ccw(c46.378,26.079) 46.537,26.238 46.405,26.37 cw(c46.564,26.529) 46.405,26.689 46.813,27.097 47.377,27.661 48.683,27.661 49.187,27.158 v1(50.2,27.158) 49.67,26.628 48.903,26.628 48.387,26.112 48.387,25.716 ccw(c48.612,25.716) 48.612,25.491 48.753,25.491 cw(c48.753,25.266) 48.978,25.266 cw(c48.753,25.266) 48.753,25.041 47.953,25.041 ccw(c47.953,24.816) 47.728,24.816 ccw(c47.953,24.816) 47.953,24.591 48.821,24.591 cw(c48.821,24.366) 49.046,24.366 cw(c48.821,24.366) 48.821,24.141 47.953,24.141 ccw(c47.953,23.916) 47.728,23.916 ccw(c47.953,23.916) 47.953,23.691 48.162,23.691 cw(c48.162,23.466) 48.387,23.466 48.387,23.391 48.475,23.303 48.729,23.303 48.914,23.303 ccw(c48.914,23.528) 49.139,23.531 49.137,23.614 cw(c49.362,23.617) 49.359,23.842 cw(c49.362,23.617) 49.587,23.62 49.589,23.525 ccw(c49.814,23.528) 49.814,23.303 50.316,23.303 50.386,23.233 50.661,22.958 50.661,21.487 50.661,21.412 ccw(c50.886,21.412) 50.886,21.187 51.026,21.187 cw(c51.026,20.962) 51.251,20.962 cw(c51.026,20.962) 51.026,20.737 50.295,20.737 ccw(c50.295,20.512) 50.07,20.512 ccw(c50.295,20.512) 50.295,20.287 50.436,20.287 cw(c50.436,20.062) 50.661,20.062 50.661,19.735 50.661,19.346 50.749,19.258 51.81,19.258 51.897,19.346 51.897,19.531 ; 51.866,19.5 51.897,19.531 ; v2(51.878,38.308) 51.878,37.385 48.89,34.398 48.89,31.785 49.421,31.254 49.818,30.858 ccw(c49.977,31.017) 50.136,30.858 50.235,30.957 cw(c50.394,30.798) 50.553,30.957 cw(c50.394,30.798) 50.553,30.639 50.243,30.329 ccw(c50.402,30.17) 50.243,30.01 ccw(c50.402,30.17) 50.561,30.01 50.871,30.32 cw(c51.031,30.161) 51.19,30.32 cw(c51.031,30.161) 51.19,30.002 51.09,29.903 ccw(c51.25,29.744) 51.09,29.585 51.462,29.214 v1(53.245,27.43) ; v2(51.897,21.487) 51.897,21.231 51.897,21.156 ccw(c52.122,21.156) 52.122,20.931 52.136,20.931 cw(c52.136,20.706) 52.361,20.706 cw(c52.136,20.706) 52.136,20.481 51.619,20.481 ccw(c51.619,20.256) 51.394,20.256 ccw(c51.619,20.256) 51.619,20.031 51.672,20.031 cw(c51.672,19.806) 51.897,19.806 51.897,19.531 ; v1(60.698,30.251) 61.512,31.064 v2(61.512,37.303)
FMC_HYPER_D2: J7.G10 U5.C4 U6.C4 U7.C4 U8.C4 | length 77.7
  Top Layer w0.15: v1(48.021,26.978) 48.021,27.098 48.333,27.41 48.333,28.251 49.862,29.78 v1(55.156,29.78) ; U5.C4@49.387,36.8 49.89,36.297 52.627,36.297 53.124,35.8 54.496,35.8 v1(55.016,36.32) 55.602,36.32 55.677,36.32 ccw(c55.677,36.5) 55.857,36.5 55.857,36.78 cw(c56.037,36.78) 56.037,36.96 56.127,36.96 cw(c56.127,36.78) 56.307,36.78 56.307,35.86 ccw(c56.487,35.86) 56.487,35.68 56.577,35.68 ccw(c56.577,35.86) 56.757,35.86 56.757,36.14 cw(c56.937,36.14) 56.937,36.32 57.46,36.32 58.52,36.32 U6.C4@59,36.8 ; U7.C4@49.394,20 49.894,20.5 52.94,20.5 53.311,20.871 54.051,20.871 54.41,20.511 54.694,20.511 55.104,20.921 v1(55.104,21.013) 55.482,21.013 55.557,21.013 ccw(c55.557,21.238) 55.782,21.238 55.782,21.458 cw(c56.007,21.458) 56.007,21.683 cw(c56.007,21.458) 56.232,21.458 56.232,20.534 ccw(c56.457,20.534) 56.457,20.309 ccw(c56.457,20.534) 56.682,20.534 56.682,20.788 cw(c56.907,20.788) 56.907,21.013 57.225,21.013 57.737,20.5 58.5,20.5 U8.C4@59,20
  Bottom Layer w0.15: J7.G10@37.46,21.08 38.134,21.754 43.491,21.754 43.943,22.206 43.996,22.259 ccw(c43.885,22.371) 43.996,22.482 43.658,22.82 cw(c43.77,22.931) 43.658,23.042 43.754,23.138 cw(c43.865,23.026) 43.977,23.138 44.875,22.24 ccw(c44.986,22.351) 45.097,22.24 45.193,22.335 ccw(c45.081,22.447) 45.193,22.558 44.295,23.456 cw(c44.406,23.567) 44.295,23.679 44.39,23.774 cw(c44.502,23.663) 44.613,23.774 45.511,22.876 ccw(c45.622,22.988) 45.734,22.876 45.829,22.972 ccw(c45.718,23.083) 45.829,23.194 44.931,24.092 cw(c45.043,24.204) 44.931,24.315 45.027,24.411 cw(c45.138,24.299) 45.249,24.411 46.147,23.513 ccw(c46.259,23.624) 46.37,23.513 46.466,23.608 ccw(c46.354,23.719) 46.466,23.831 45.568,24.729 cw(c45.679,24.84) 45.568,24.951 45.663,25.047 cw(c45.774,24.936) 45.886,25.047 46.784,24.149 ccw(c46.895,24.26) 47.006,24.149 47.102,24.244 ccw(c46.991,24.356) 47.102,24.467 46.764,24.805 cw(c46.876,24.916) 46.764,25.028 47.112,25.375 47.148,25.411 47.148,26.211 47.915,26.978 v1(48.021,26.978) ; v1(55.016,36.32) 55.553,35.783 55.553,34.101 55.309,33.856 55.156,33.703 55.156,33.556 ccw(c55.381,33.556) 55.381,33.331 55.396,33.331 cw(c55.396,33.106) 55.621,33.106 cw(c55.396,33.106) 55.396,32.881 55.196,32.881 ccw(c55.196,32.656) 54.971,32.656 ccw(c55.196,32.656) 55.196,32.431 55.396,32.431 cw(c55.396,32.206) 55.621,32.206 cw(c55.396,32.206) 55.396,31.981 55.196,31.981 ccw(c55.196,31.756) 54.971,31.756 ccw(c55.196,31.756) 55.196,31.531 55.396,31.531 cw(c55.396,31.306) 55.621,31.306 cw(c55.396,31.306) 55.396,31.081 55.381,31.081 ccw(c55.381,30.856) 55.156,30.856 55.156,30.286 v1(55.156,29.78) 55.156,29.128 55.476,28.808 55.476,27.661 55.299,27.484 55.299,24.17 55.018,23.89 55.018,21.098 v1(55.104,21.013)